# EAGLE board Adafruit NeoPixel Ring 24 B - Holder (EAGLE 9.5.2)
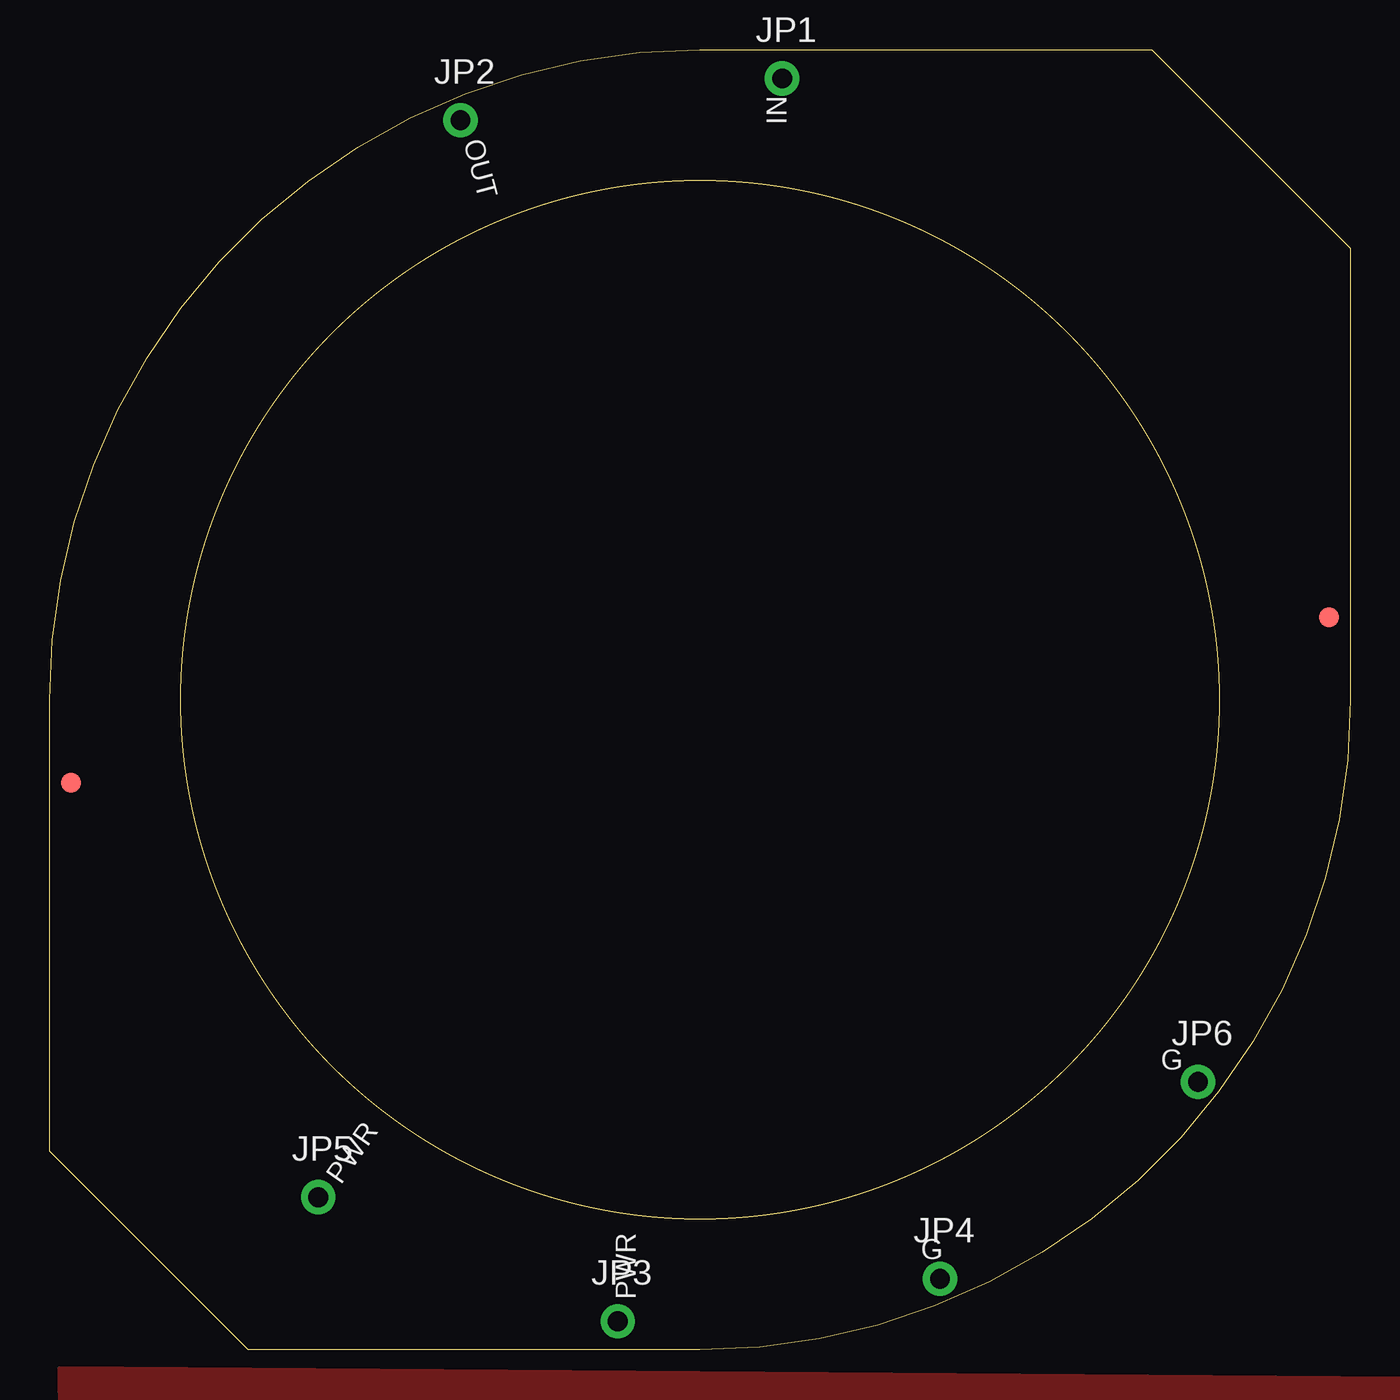
[diagram p0: board, top side]
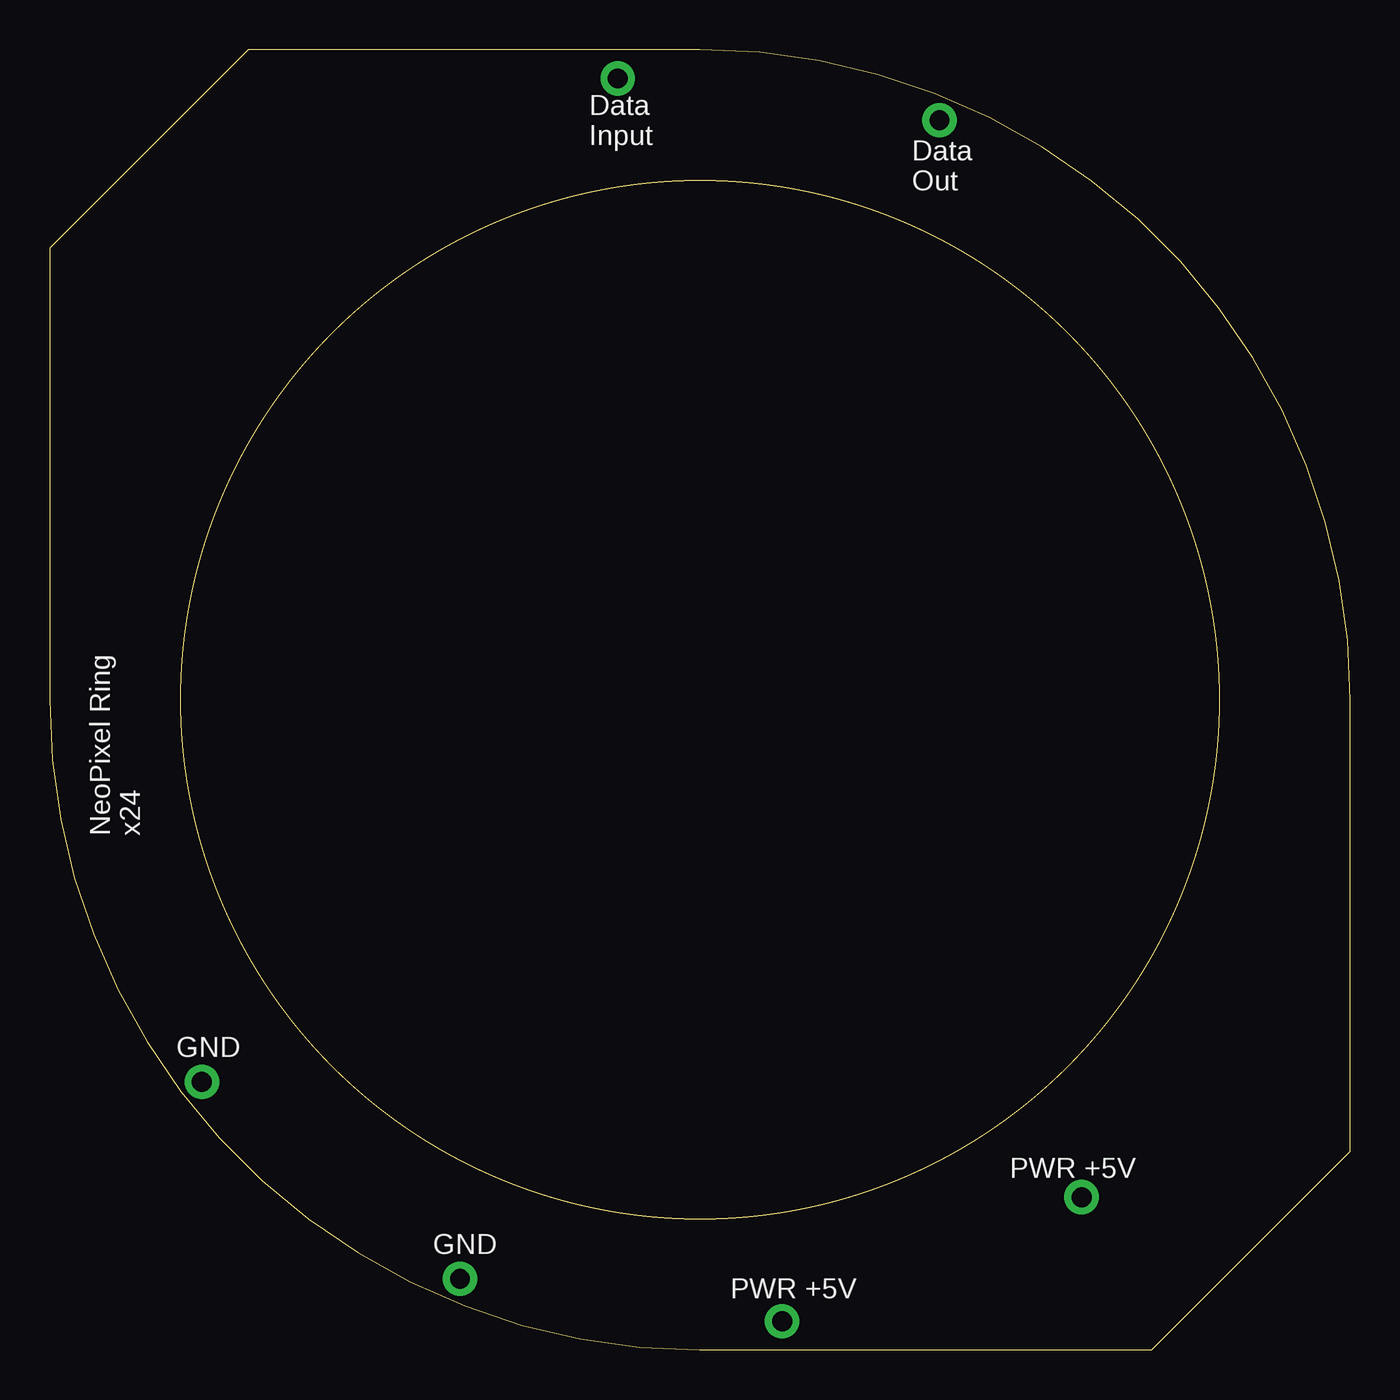
[diagram p1: board, bottom side, seen from below]

Size 65.53 x 65.54 mm. Coordinates in mm from the lower left corner, seen from the top.
Outline: 0,32.77 arc-90 32.77,65.53 32.93,65.54 55.53,65.54 65.53,55.54 65.53,32.77 arc-90 32.77,0 32.38,0.01 10,0.01 0,10.01 0,32.77
Outline: circle at 32.77,32.77 radius 26.16
Copper layers (1*16): Top 0.035mm / dielectric 1.5mm / Bottom 0.035mm
Design rules "adafruit": minimum track width 8mil, minimum drill 15.5mil, track to track 8mil, track to pad 8mil, pad to pad 8mil, via to via 8mil, smd to smd 8mil, copper to edge 10mil, drill to drill 8mil, minimum pad ring 10mil, minimum via ring 8mil, stop-mask expansion 4mil, vias tented up to drill 20mil, thermal gap 10mil

## Footprints (pad centres in the part's own frame; a part is rotated, then mirrored left to right if it is on the bottom)
FIDUCIAL_1MM = smd 1 x 1: 1 0,0
1X01-CLEANBIG = drill 1 pad 1.727: 1 0,0

## Placement (x,y rotation side)
FID1  FIDUCIAL""  [FIDUCIAL_1MM]  1.07,28.57 0 top
FID2  FIDUCIAL""  [FIDUCIAL_1MM]  64.47,36.93 0 top
JP1  [1X01-CLEANBIG]  36.91,64.08 0 top
JP2  [1X01-CLEANBIG]  20.7,61.98 0 top
JP3  [1X01-CLEANBIG]  28.63,1.45 0 top
JP4  [1X01-CLEANBIG]  44.86,3.58 0 top
JP5  [1X01-CLEANBIG]  13.54,7.7 0 top
JP6  [1X01-CLEANBIG]  57.86,13.51 0 top
U$1  [ADAFRUIT_5MM]  84.03,45.4 0 bottom  (outside the outline)

## Library data of the parts
FID1 FID2 = microbuilder; BOM: EXCLUDE
JP1-JP6 U$1 = NeoPixelRing

## Nets
N$24: JP2.1

## Tracks (layer width: path | path; a pad name or v marks a point on that pad's centre or on a via)
GND
  pour Top (rank 2): 0.51,-0.96 0.62,-10.45 68.35,-10.97 68.24,-1.48
VDD
  pour Bottom: -16.31,10.23 -16.6,-15.13 -4.65,-15.09 -4.36,10.28

## Text on the board
tPlace: IN | OUT | G | PWR | G | PWR
bPlace: Data / Input | Data / Out | NeoPixel Ring / x24 | GND | PWR +5V | GND | PWR +5V